# Altium PCB WSN_PCB.PcbDoc
Units mil, origin at the board's own origin, x right, y up, seen from the top; angles counter-clockwise.
Board outline 2375 x 2075 mil, 2 copper layers (Top Layer, Bottom Layer); 48 components, 44 nets, 216 pads, 65 vias.
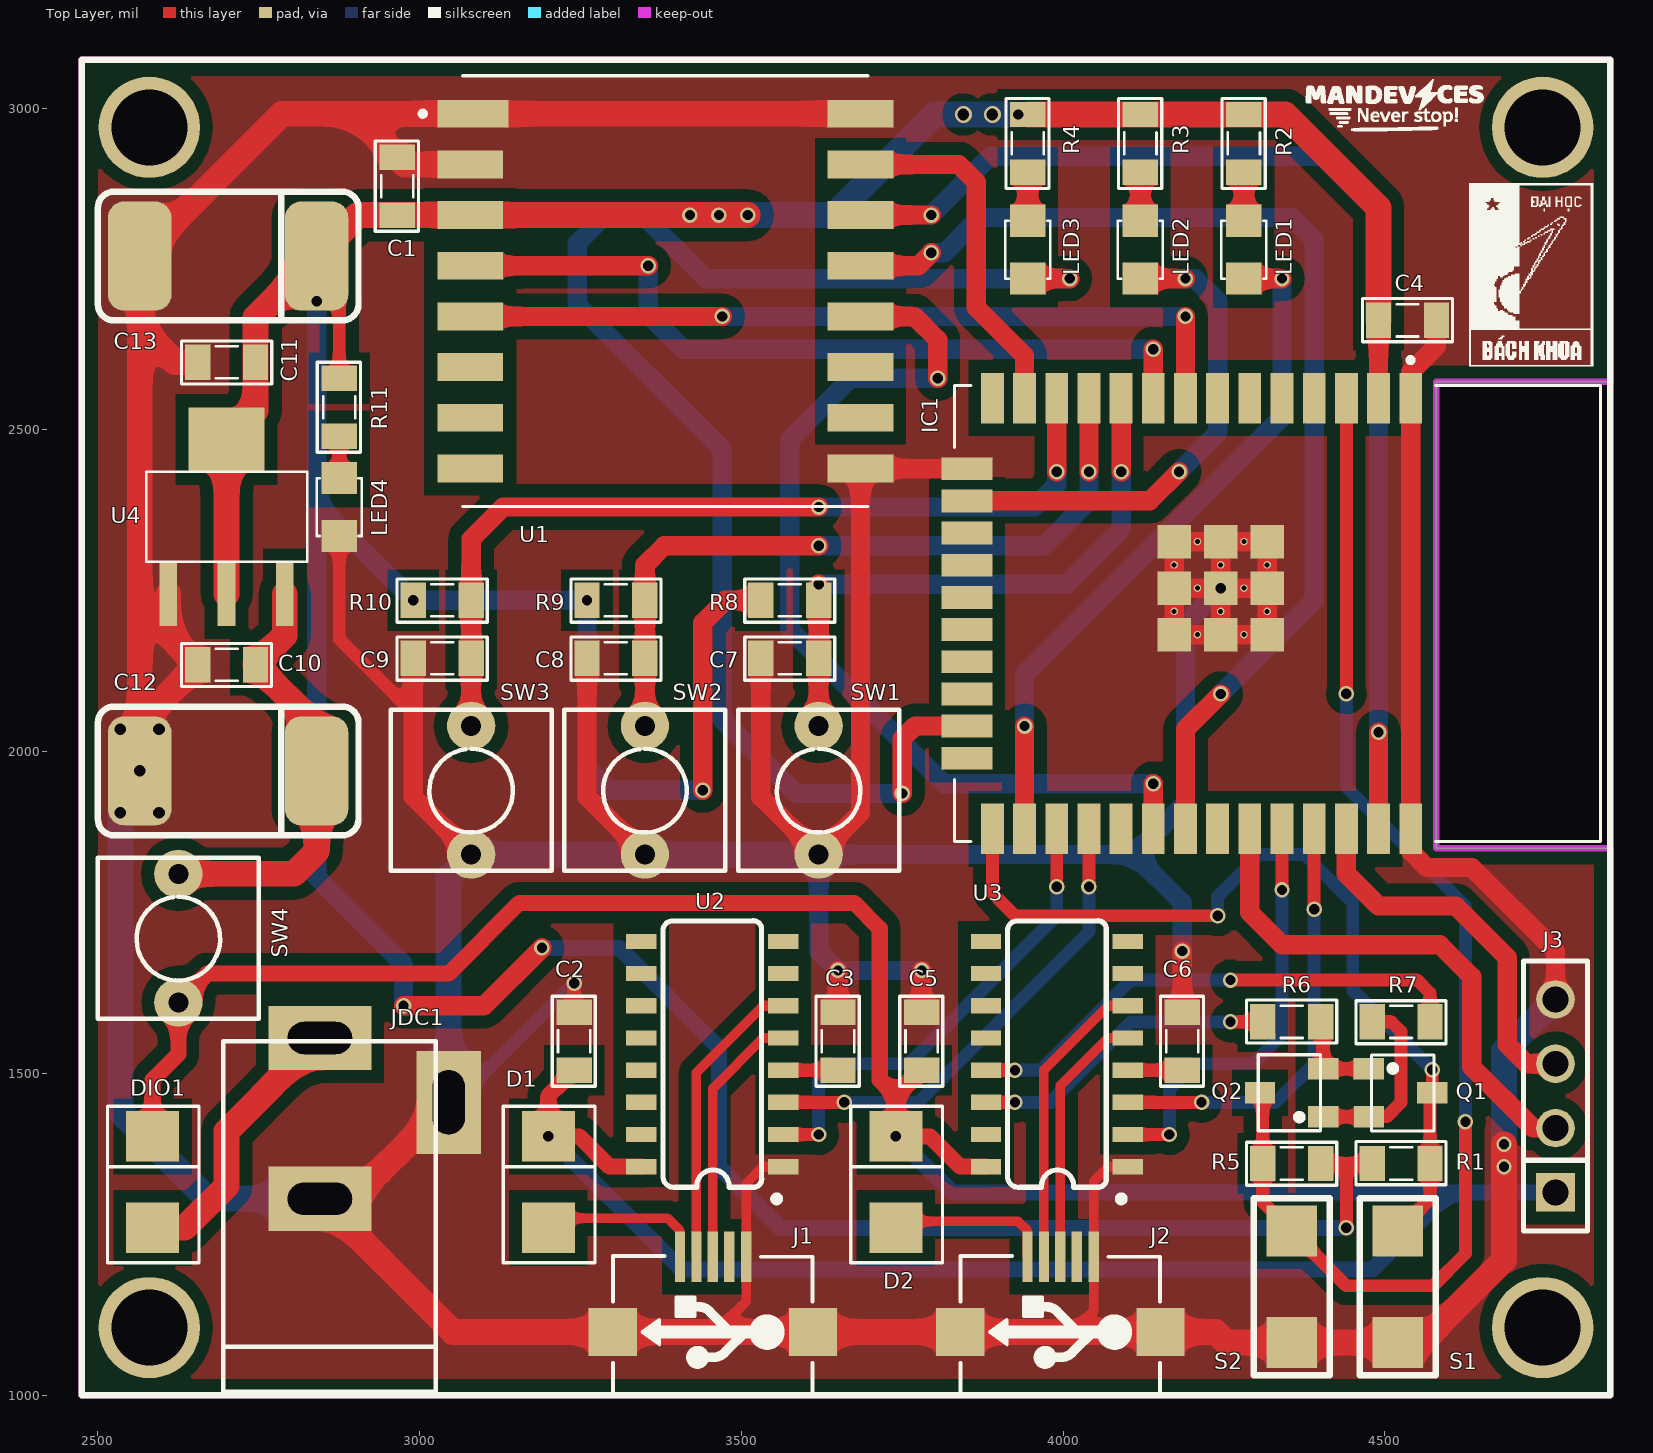
[diagram p0: Top Layer view]
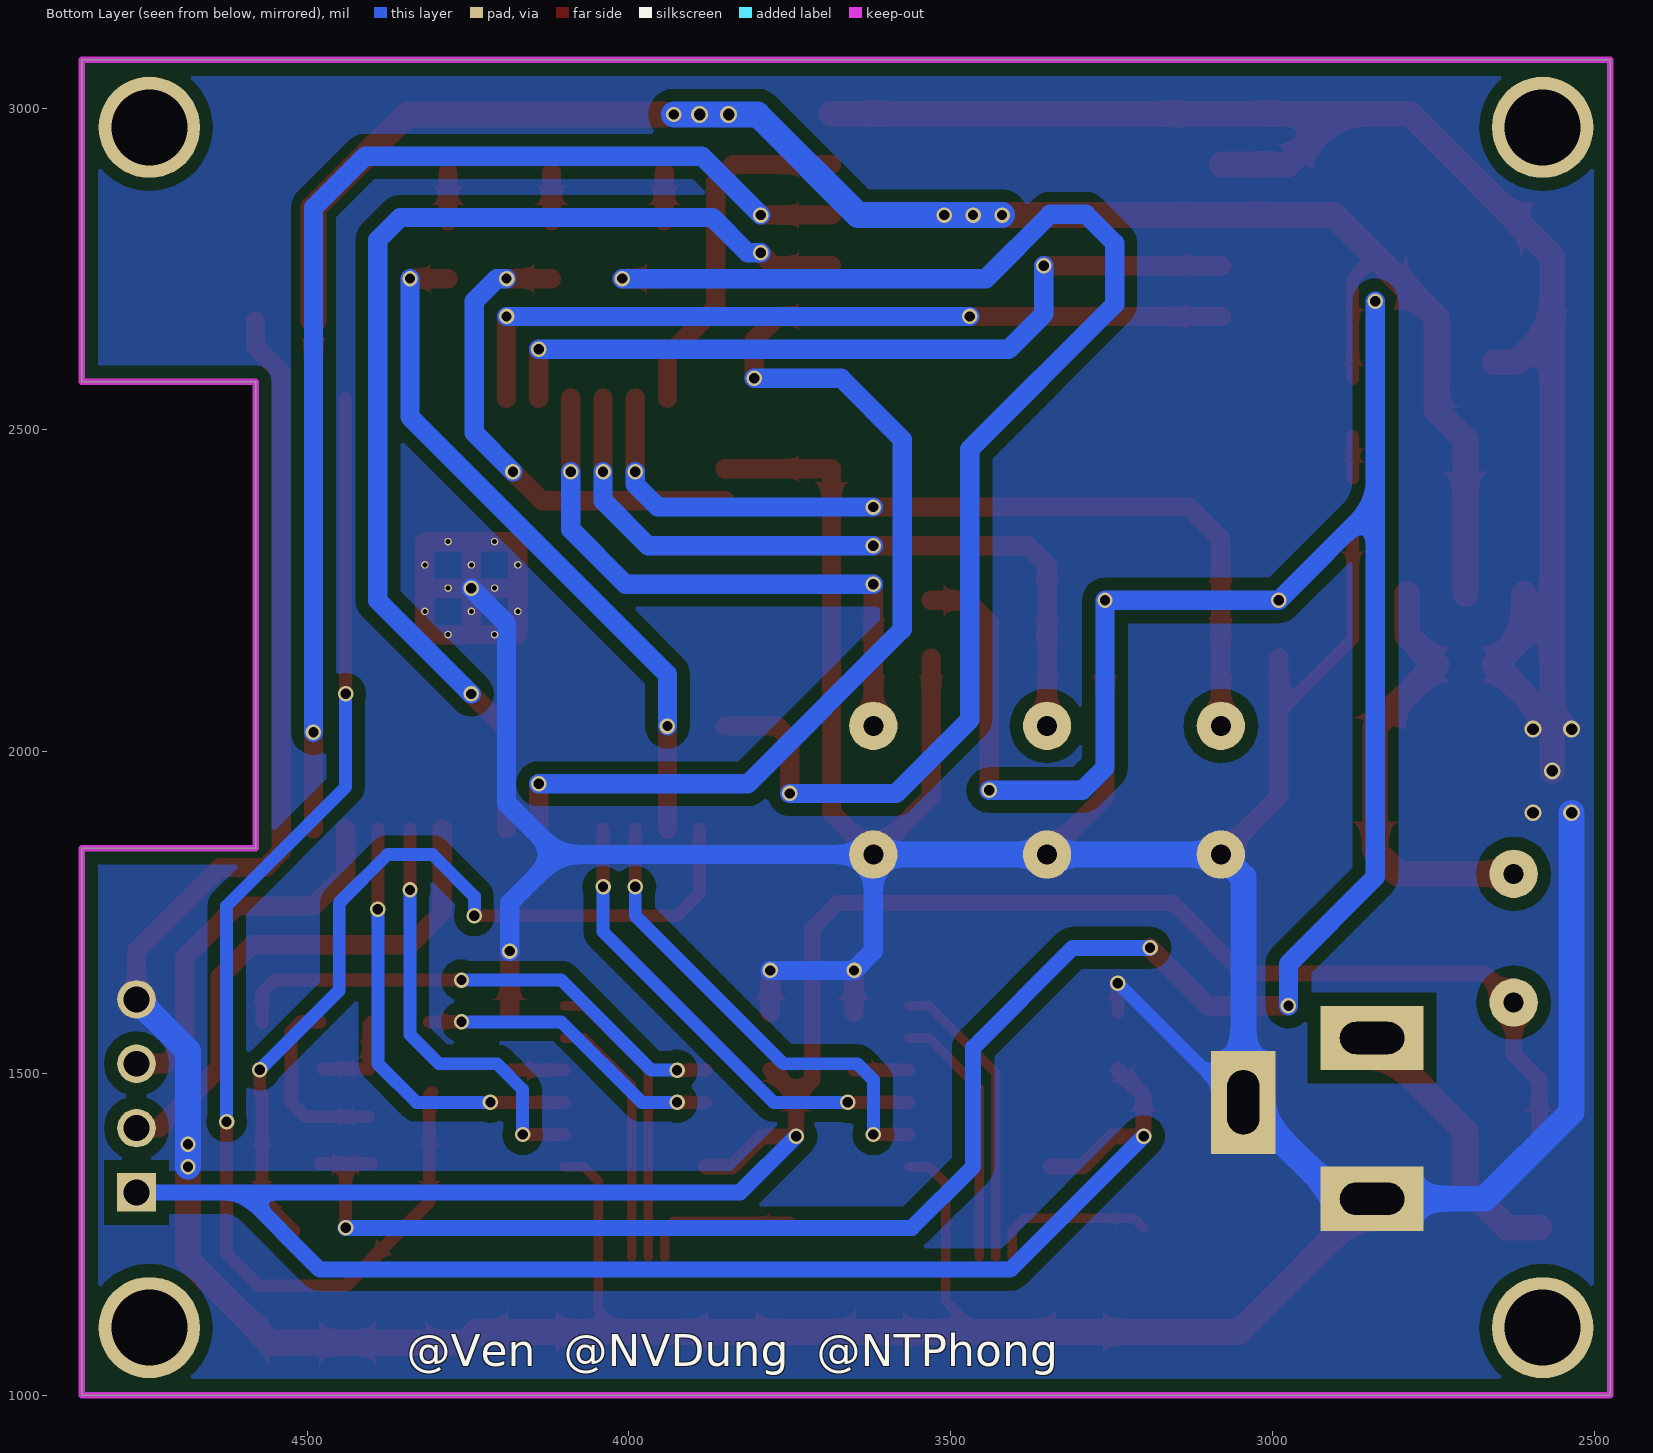
[diagram p1: Bottom Layer view, seen from below]
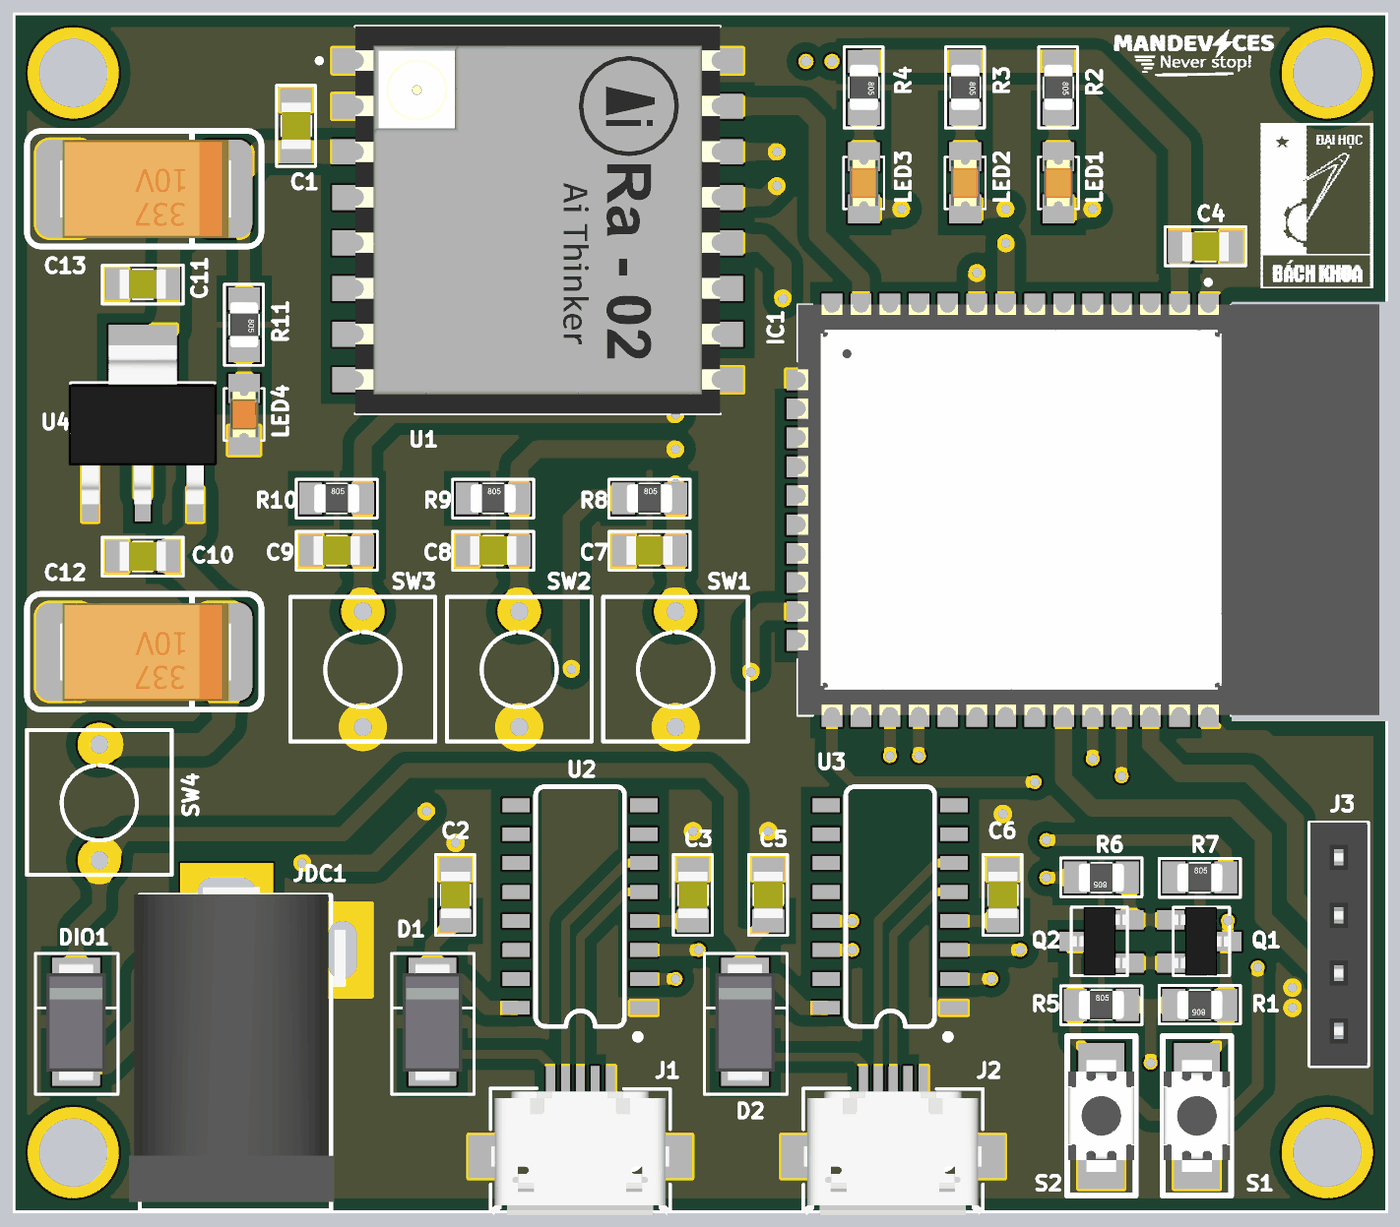
[diagram p2: 3D render of the assembled board from above, using the file's embedded part models]

## Layer stack, top to bottom
Top Solder: solder mask 0.4, Solder Resist, Dk 3.5
Top Layer: signal copper 1.4
Dielectric 1: dielectric 12.6, FR-4, Dk 4.8
Bottom Layer: signal copper 1.4
Bottom Solder: solder mask 0.4, Solder Resist, Dk 3.5

## Board outline
2475,1000 2475,3075 4850,3075 4850,2575 4580,2575 4580,1850 4850,1850 4850,1000

## Design rules (kind name [scope] priority, off if disabled: settings)
Clearance [All] p1: gap=20 ignorepadtopadclearanceinfootprint=TRUE except(0: Arc-Text Arc-Hole Track-Text Track-Hole SMDPad-Text SMDPad-Hole THPad-Text THPad-Hole Via-Text Via-Hole Fill-Text Fill-Hole Poly-Text Poly-Hole Region-Text Region-Hole Text-Text Text-Hole; 7: Arc-Arc Arc-Track Arc-SMDPad Track-Track Track-SMDPad SMDPad-SMDPad; 10: Arc-THPad Arc-Via Track-THPad Track-Via SMDPad-THPad SMDPad-Via THPad-THPad THPad-Via Via-Via)
DiffPairsRouting [All] p1: maxlimit=10 minlimit=10 mostfreqgap=10 toplayer_minwidth=15 toplayer_maxwidth=15 toplayer_prefwidth=15 bottomlayer_minwidth=15 bottomlayer_maxwidth=15 bottomlayer_prefwidth=15 maxuncoupledlength=500
PolygonConnect [All] p1: connectstyle=Direct reliefconductorwidth=10 reliefentries=4 polygonreliefangle="90 Angle" airgapwidth=10
RoutingVias [All] p1: holewidth=16 width=24 viastyle="Through Hole" minholewidth=16 minwidth=24 maxholewidth=20 maxwidth=28
SolderMaskExpansion [All] p1: expansion=4
Width [All] p1: maxlimit=40 minlimit=10 preferedwidth=20
29 further rules are at their usual default settings.

## Classes and differential pairs
component class U_POWER: C10 C11 C12 C13 DIO1 JDC1 LED4 R11 SW4 U4
component class U_MCU: C4 C5 C6 C7 C8 C9 D2 IC1 J2 J3 LED1 LED2 LED3 Q1 Q2 R1 R2 R3 R4 R5 R6 R7 R8 R9 R10 S1 S2 SW1 SW2 SW3 U3
component class U_COMM: C1 C2 C3 D1 J1 U1 U2
differential pair D1: +D1_P -D1_N
differential pair D0: +D0_P -D0_N

## Components (designator, comment, footprint, x,y, rotation, side; value= is the part's Value field where it differs from the comment)
C1 "10uF" CAP_0805 2965,2878.7 r270 top value=33p
C2 "10uF" CAP_0805 3240,1550 r270 top value=33p
C3 "100nF" CAP_0805 3650,1550 r270 top value=33p
C4 "10uF" CAP_0805 4535,2670 r180 top value=33p
C5 "10uF" CAP_0805 3780,1550 r270 top value=33p
C6 "100nF" CAP_0805 4185,1550 r270 top value=33p
C7 "10uF" CAP_0805 3575,2145 r0 top value=33p
C8 "10uF" CAP_0805 3305,2145 r0 top value=33p
C9 "10uF" CAP_0805 3035,2145 r0 top value=33p
C10 "220nF" CAP_0805 2700,2135 r0 top value=33p
C11 "100nF" CAP_0805 2700,2605 r0 top value=33p
C12 "220uF/10V" CAP_7343 2705,1970 r180 top
C13 "220uF/10V" CAP_7343 2705,2770 r180 top
D1 "Diode SMD" DIO-214AC(SMA) 3203,1309 r270 top value=1N5007
D2 "Diode SMD" DIO-214AC(SMA) 3743,1309 r270 top value=1N5007
DIO1 "Diode SMD" DIO-214AC(SMA) 2588,1309 r270 top value=1N5007
IC1 "ESP32-WROOM-32" MODULE_ESP32-WROOM-32 4332.91,2214.65 r270 top
J1 "USB-5" USB-M1 3455.51,1215 r180 top
J2 "USB-5" USB-M1 3995.51,1215 r180 top
J3 "JP4" JP4-C1T 4765,1315 r90 top
JDC1 "Jac DC" DC-IN 2945,1430 r90 top
LED1 "LED" LED-0805-Orange 4280.85,2825 r270 top value="LED 3 ly Single Colour"
LED2 "LED" LED-0805-Orange 4120,2825 r270 top value="LED 3 ly Single Colour"
LED3 "LED" LED-0805-Orange 3945,2825 r270 top value="LED 3 ly Single Colour"
LED4 "LED" LED-0805-Red 2875,2425 r270 top value="LED 3 ly Single Colour"
Q1 "2SC1815" SOT23D 4524.21,1469.6 r270 top value=C1815
Q2 "2SC1815" SOT23D 4355,1470 r90 top value=C1815
R1 "10k" RES-SMD-0805 4525,1360 r180 top
R2 "10k" RES-SMD-0805 4280.85,2945 r270 top
R3 "10k" RES-SMD-0805 4120,2945 r270 top
R4 "10k" RES-SMD-0805 3945,2945 r270 top
R5 "10k" RES-SMD-0805 4355,1360 r0 top
R6 "10k" RES-SMD-0805 4355,1580 r180 top
R7 "10k" RES-SMD-0805 4525,1580 r0 top
R8 "10k" RES-SMD-0805 3575,2235 r0 top
R9 "10k" RES-SMD-0805 3305,2235 r0 top
R10 "10k" RES-SMD-0805 3035,2235 r0 top
R11 "1k" RES-SMD-0805 2875,2535 r270 top
S1 "SW-SMD" "SW 3x2x4" 4520,1168.39 r270 top
S2 "SW-SMD" "SW 3x2x4" 4355,1168.39 r270 top
SW1 "SW" SW2 3620,1840 r90 top value="SW chip 2 pin"
SW2 "SW" SW2 3350,1840 r90 top value="SW chip 2 pin"
SW3 "SW" SW2 3080,1840 r90 top value="SW chip 2 pin"
SW4 "SW" SW2 2625,1610 r90 top value="SW chip 2 pin"
U1 "Ra-02 LoRa" Ra-02 3381.85,2715.59 r0 top
U2 "CH340C" SOP-16 3454.76,1530 r90 top
U3 "CH340C" SOP-16 3990.24,1530 r90 top
U4 "LM1117-ADJ" LM1117-SOP 2700,2295 r0 top

## Footprints (in the part's own frame and the unit in brackets; to place one, negate y for a bottom-side part, rotate by r counter-clockwise, add the part's x,y. Pads: shape width x height; smd on the part's side, far side on the other; paste and mask are expansions set on the pad)
CAP_0805 [mil]
  rect 39.37x55 smd: 1(-45,0) 2(45,0)
  silkscreen extent -70,-34 70,33, body extent -40,-25 40,25, height 24
CAP_7343 [mm] "Capacitor Tantalum 7343"
  rrect50% 2.5x4.3 smd: 1(-3.429,0) 2(3.556,0)
  silkscreen extent -5.08,-2.54 5.21,2.54, body extent -3.75,-2.14 3.75,2.16, height 2.8
DC-IN [mil] "Jac DC input"
  rect 100x160 hole 50 slot 100 at 90 deg: 1(125,100) 2(-125,100)
  rect 160x100 hole 50 slot 100 at 0 deg: 3(25,-100)
  silkscreen extent -425,-80 120,250, body extent -410,-105 134,269, height 434
DIO-214AC(SMA) [mm] "DO-214AC Diode Smallest Size"
  rect 2x2.1 smd: 1(1.245,-0.076) 2(-2.367,-0.076)
  silkscreen extent -3.56,-1.86 2.62,1.76, body extent -3.13,-1.38 2.07,1.22, height 2.4
JP4-C1T [mm] "4 row, straight, gold plating"
  rect 1.52x1.52 hole 1.02: 1(0,0)
  round 1.52 hole 1.02: 2(2.54,0) 3(5.08,0) 4(7.62,0)
  silkscreen extent -1.52,-1.27 9.14,1.27, body extent -1.52,-1.25 9.14,1.25, height 8.51
LED-0805-Orange [mil]
  rect 50x55 smd: 1(0,0) 2(90,0)
  silkscreen extent 0,-35 90,35, body extent 5,-25 85,25, height 43
LED-0805-Red [mil]
  rect 50x55 smd: 1(0,0) 2(90,0)
  silkscreen extent 0,-35 90,35, body extent 5,-25 85,25, height 43
LM1117-SOP [mm]
  rect 0.7x2.54 smd: 1(-2.3,-1.27) 2(0,-1.27) 3(2.3,-1.27)
  rect 3x2.54 smd: 2(0,4.826)
  silkscreen extent -3.17,0 3.17,3.56, body extent -3.25,-1.78 3.25,5.18, height 1.68
MODULE_ESP32-WROOM-32 [mm]
  rect 2x0.9 smd: 1(-8.5,5.26) 2(-8.5,3.99) 3(-8.5,2.72) 4(-8.5,1.45) 5(-8.5,0.18) 6(-8.5,-1.09) 7(-8.5,-2.36) 8(-8.5,-3.63) 9(-8.5,-4.9) 10(-8.5,-6.17) 11(-8.5,-7.44) 12(-8.5,-8.71) 13(-8.5,-9.98) 14(-8.5,-11.25) 25(8.5,-11.25) 26(8.5,-9.98) 27(8.5,-8.71) 28(8.5,-7.44) 29(8.5,-6.17) 30(8.5,-4.9) 31(8.5,-3.63) 32(8.5,-2.36) 33(8.5,-1.09) 34(8.5,0.18) 35(8.5,1.45) 36(8.5,2.72) 37(8.5,3.99) 38(8.5,5.26)
  rect 0.9x2 smd: 15(-5.715,-12.25) 16(-4.445,-12.25) 17(-3.175,-12.25) 18(-1.905,-12.25) 19(-0.635,-12.25) 20(0.635,-12.25) 21(1.905,-12.25) 22(3.175,-12.25) 23(4.445,-12.25) 24(5.715,-12.25)
  rect 1.33x1.33 smd: 39_1(-2.835,-0.405) 39_2(-1,-0.405) 39_3(0.835,-0.405) 39_4(-2.835,-2.24) 39_5(-1,-2.24) 39_6(0.835,-2.24) 39_7(-2.835,-4.075) 39_8(-1,-4.075) 39_9(0.835,-4.075)
  round 0.3 hole 0.2: 39_10(-1.917,-0.405) 39_11(-0.082,-0.405) 39_12(-2.835,-1.322) 39_13(-1,-1.322) 39_14(0.835,-1.322) 39_15(-1.917,-2.24) 39_16(-0.082,-2.24) 39_17(-2.835,-3.157) 39_18(-1,-3.157) 39_19(0.835,-3.157) 39_20(-1.917,-4.075) 39_21(-0.082,-4.075)
  silkscreen extent -10.1,-12.75 9,12.75, body extent -10.54,-12.75 8.98,12.75, height 3.2
Ra-02 [mm]
  rect 2.8x1.1 smd: 1(-7.6,7)
  rect 2.6x1.1 smd: 2(-7.7,5) 3(-7.7,3) 4(-7.7,1) 5(-7.7,-1) 6(-7.7,-3) 7(-7.7,-5) 8(-7.7,-7) 9(7.7,-7) 10(7.7,-5) 11(7.7,-3) 12(7.7,-1) 13(7.7,1) 14(7.7,3) 15(7.7,5) 16(7.7,7)
  silkscreen extent -9.68,-8.5 8,8.5, body extent -8,-8.49 8,8.51, height 3.03
RES-SMD-0805 [mil]
  rect 39.37x55 smd: 1(-45,0) 2(45,0)
  silkscreen extent -70,-34 70,33, body extent -39,-25 39,25, height 31
SOP-16 [mm]
  rect 0.6x1.2 smd: 1(-4.445,-2.8) 2(-3.175,-2.8) 3(-1.905,-2.8) 4(-0.635,-2.8) 5(0.635,-2.8) 6(1.905,-2.8) 7(3.175,-2.8) 8(4.445,-2.8) 9(4.445,2.8) 10(3.175,2.8) 11(1.905,2.8) 12(0.635,2.8) 13(-0.635,2.8) 14(-1.905,2.8) 15(-3.175,2.8) 16(-4.445,2.8)
  silkscreen extent -5.84,-2.67 5.26,1.95, body extent -4.95,-3.47 4.95,3.47, height 1.75
SOT23D [mm] "SOT 23C - 1-3-2 - BCE"
  rect 0.85x1.2 smd: 1(-0.95,-1.25) 2(0.94,-1.245) 3(0,1.25)
  silkscreen extent -1.5,-1.14 1.5,1.32, body extent -1.5,-1.17 1.5,1.33, height 1.06
SW2 [mil] "SW button 2pin, 250x 250 mil"
  round 75 hole 31: 1(0,0) 2(200,0)
  silkscreen extent -25,-125 225,125
"SW 3x2x4" [mm]
  rect 2x2 smd: 1(-2.2,0) 2(2.2,0)
  silkscreen extent -3.5,-1.5 3.5,1.5, body extent -2.45,-1.45 2.45,1.45, height 2
USB-M1 [mm]
  rect 0.4x2 smd: 1(1.3,0) 2(0.65,0) 3(0,0) 4(-0.65,0) 5(-1.321,0)
  rect 1.9x1.9 smd: 5(-3.95,2.968) 5(3.95,2.968)
  silkscreen extent -3.94,-0.03 3.94,5.46, body extent -3.98,0.11 4,5.54, height 2.71

## Part data
C1 C2 C3 C4 C5 C6 C7 C8 C9 C10 C11: library part CapSMD, "Capacitor", LatestRevisionDate=17-Jul-2002, LatestRevisionNote="Re-released for DXP Platform.", PackageReference=RAD-0.3, Published=8-Jun-2000, Publisher="Altium Limited"
C12 C13: library part CAP_TAN_SMD, "Polazied Tantalum Capacitor"
D1 D2 DIO1: "Default Diode", Code - JEDEC=DO-214-AB, Published=8-Jun-2000, Publisher="Altium Limited", Revision="July-2002: Re-released for DXP Platform."
IC1: "Bluetooth, WiFi Transceiver Module 2.4GHz ~ 2.5GHz Surface Mount", Package="Module Espressif Systems", Digi-Key_Part_Number=1904-1010-1-ND, Digi-Key_Purchase_URL=https://www.digikey.com/product-detail/en/espressif-systems/ESP32-WROOM-32/1904-1010-1-ND/8544305?utm_source=snapeda&utm_medium=aggregator&utm_campaign=symbol, MF="Espressif Systems", MP=ESP32-WROOM-32, SnapEDA_Link=https://www.snapeda.com/parts/ESP32-WROOM-32/Espressif%20Systems/view-part/2753322/?ref=snap
J1 J2: Manufacturer=FCI, Manufacturer Part Number=10118193-0001LF, Supplier Part Number 1=609-4616-1-ND, .Checked PCB=RF, .Checked SCH=MM, .Creator=MM, Category="Connectors, Interconnects", ComponentLink1Description=http://portal.fciconnect.com/Comergent//fci/drawing/10118193.pdf, ComponentLink1URL=http://portal.fciconnect.com/Comergent//fci/drawing/10118193.pdf, Connector Type="USB - micro B", Features="Shielded, Solder Retention", Gender=Receptacle, Ingress Protection=-, Mounting Type="Surface Mount, Right Angle, Horizontal", Number of Contacts=5, Packaging="Cut Tape (CT)", Pricing 1="1=0.46, 10=0.433, 25=0.3712, 50=0.3156, 100=0.3032, 250=0.27224, 500=0.25988 (USD)", RoHS="RoHS Compliant", Specifications="USB 2.0", Stock 1=28642, Supplier 1=Digi-Key
J3: "WR-PHD 2.54 mm Angled Socket Header", Manufacturer="Würth Elektronik eiSos GmbH", partNo=613004143121, ComponentLink1 Description=Manufacturer, ComponentLink1URL=http://www.we-online.com, ComponentLink2 Description=Datasheet, ComponentLink2URL=http://katalog.we-online.de/em/datasheet/6130xx143121.pdf, Created by="Karrer Zheng", Created Date="29 March 2013", NoPins=04
JDC1: library part DCIN, "Jac DC input"
LED1 LED2 LED3 LED4: "LED Single colour Green and Red"
Q1 Q2: library part C1815, "NPN 600mW, ECB", =C2383
R1 R2 R3 R4 R5 R6 R7 R8 R9 R10 R11: library part "Resistor - SMD", "Resistor SMD", Manufacturer="Generic Components", Class=Passive, Published=08/06/2000, Publisher="Altium Hobart Technology Centre"
S1 S2: "Switch", LatestRevisionDate=17-Jul-2002, LatestRevisionNote="Re-released for DXP Platform.", PackageReference=SPST-2, Published=24-Mar-1999, Publisher="Altium Limited"
SW1 SW2 SW3 SW4: library part SW2, "Switch button 2 pin"
U1: "LoRa Module Ra-02"
U2 U3: "USB to serial chip CH340", Package=Package, Availability=Unavailable, Check_prices=https://www.snapeda.com/parts/CH340C/WCH/view-part/5428851/?ref=eda, MF=WCH, MP=CH340C, Price=None, SnapEDA_Link=https://www.snapeda.com/parts/CH340C/WCH/view-part/5428851/?ref=snap
U4: "800mA Low-Dropout Linear Regulator", Creator="Nguyen Ba Bien", Website=http://group3i.net

## Free pads (board coordinates)
  round 157.48 hole 118.11: 0(2580,1105) 0(2580,2970) 0(4745,1105) 0(4745,2970)

## Via types
v1: diameter 24, hole 16, Top Layer to Bottom Layer, 58 vias
v2: diameter 26, hole 18, Top Layer to Bottom Layer, 7 vias

## Nets (pads, with @x,y where several pads share a name; then routed paths per layer and width w, separated by ;. In a path a pad name is that pad's centre, name@x,y a point inside that pad or via, vN(x,y) a via of type N, cw(c..) or ccw(c..) an arc to the next point about the centre after c; other vN are vias at no path point)
3V3: C1.2 C4.2 C11.2 C13.1 IC1.2 R1.2 R2.1 R3.1 R4.1 R5.2 R8.1 R9.1 R10.1 R11.1 U1.3 U4.2 | length 7382.3
  Top Layer w20: C13.1 2875,2735 R11.1 ; R5.2 4440,1360 ; v1(4440,1260) 4440,1360 ; R1.2 4440,1360
  Top Layer w30: v1(2975,1605) 3100,1605 v1(3190,1695) ; v1(3440,1940) 3440,2200 3475,2235 R8.1 ; IC1.2 C4.2
  Top Layer w40: U4.2@2700,2245 2700,2485 2745,2530 C11.2 2745,2675 C13.1 2903.7,2833.7 C1.2 U1.3 v1(3420,2833.7) v1(3465,2833.7) v1(3510,2833.7) ; R4.1 R3.1 R2.1 4345,2990 4490,2845 C4.2
  Bottom Layer w25: v1(3190,1695) 3310,1695 3465,1540 3465,1355 3560,1260 v1(4440,1260)
  Bottom Layer w30: v1(2840,2700) 2840,2385 ; v1(2975,1605) 2975,1670 2840,1805 2840,2385 ; v1(3440,1940) 3295,1940 3260,1975 v1(3260,2235) v1(2990,2235) 2840,2385
  Bottom Layer w40: v1(3420,2833.7) v1(3465,2833.7) v1(3510,2833.7) 3643.7,2833.7 3800,2990 v2(3845,2990) v2(3890,2990) v1(3930,2990)
5V: C2.2 C5.2 D1.2 D2.2 DIO1.2 J3.1 SW4.1 U2.16 U3.16 | length 4824.5
  Top Layer w25: DIO1.2 2585,1490 2625,1530 SW4.1 2670,1655 3045,1655 3155,1765 3675,1765 3715,1725 3715,1490 3740,1465 ; C2.2 3200,1465 v1(3200,1402.2) 3247.8,1402.2 3295,1355 U2.16 ; C5.2 3740,1465 ; U3.16 3840,1355 3792.79,1402.2 v1(3740,1402.2) 3740,1465
  Bottom Layer w25: v1(3200,1402.2) 3407.2,1195 4480,1195 4600,1315 ; v1(3740,1402.2) 3827.2,1315 4600,1315 ; J3.1 4600,1315
D0_N: J2.2 U3.6 | length 462.3
  Top Layer w15: J2.2 3969.92,1505.57 4069.35,1605 U3.6
D0_P: J2.3 U3.5 | length 401.7
  Top Layer w15: J2.3 3995.51,1481.16 4069.35,1555 U3.5
D1_N: J1.2 U2.6 | length 464.2
  Top Layer w15: J1.2 3429.92,1501.04 3533.88,1605 U2.6
D1_P: J1.3 U2.5 | length 403.6
  Top Layer w15: J1.3 3455.51,1476.63 3533.88,1555 U2.5
GND: C1.1 C2.1 C3.1 C4.1 C5.1 C6.1 C7.1 C8.1 C9.1 C10.1 C11.1 C12.2 C13.2 IC1.1 IC1.15 IC1.38 IC1.39_1 IC1.39_2 IC1.39_3 IC1.39_4 IC1.39_5 IC1.39_6 IC1.39_7 IC1.39_8 IC1.39_9 IC1.39_10 IC1.39_11 IC1.39_12 IC1.39_13 IC1.39_14 IC1.39_15 IC1.39_16 IC1.39_17 IC1.39_18 IC1.39_19 IC1.39_20 IC1.39_21 J1.5 J2.5 J3.4 JDC1.2 JDC1.3 LED4.2 S1.2 S2.2 SW1.1 SW2.1 SW3.1 U1.1 U1.2 U1.9 U1.16 U2.1 U3.1 U4.1 | length 14259.2
  Top Layer w15: 3460,1098.16 3507.51,1145.67 3507.51,1215 3507.51,1328.63 3533.88,1355 U2.1 ; 4015,1098.16 4047.51,1130.67 4047.51,1215 4047.51,1332.51 4070,1355 U3.1
  Top Layer w20: LED4.2 2875,2175 2990,2060 ; C2.1 v1(3240,1640)
  Top Layer w30: C9.1 2990,2060 2990,1930 SW3.1 ; C8.1 3260,1930 SW2.1 ; C7.1 3530,1930 SW1.1 3685,1905 U1.9 3685.35,2439.65 IC1.15 ; C3.1 v1(3650,1660) ; C5.1 v1(3780,1660) ; C6.1 v1(4185,1690) ; C4.1 4580,2630 4540,2590 IC1.1 IC1.38 4540,1845 4565,1820 4635,1820 4765,1690 J3.4 ; IC1.39_8 IC1.39_18 IC1.39_5 ; IC1.39_8 IC1.39_20 IC1.39_7 IC1.39_17 IC1.39_4 ; IC1.39_8 IC1.39_21 IC1.39_9 IC1.39_19 IC1.39_6 ; IC1.39_6 IC1.39_16 IC1.39_5 ; IC1.39_6 IC1.39_14 IC1.39_3 IC1.39_11 IC1.39_2 ; IC1.39_5 IC1.39_15 IC1.39_4 ; IC1.39_5 v1(4245,2254.02) IC1.39_13 IC1.39_2 ; IC1.39_4 IC1.39_12 IC1.39_1 IC1.39_10 IC1.39_2
  Top Layer w40: v2(2565,1970) C12.2@2565,2045 ; U4.1 2609.45,2180.55 ; C11.1 2620,2605 2565,2660 ; JDC1.3 2895,1305 JDC1.2 3051.84,1098.16 3300,1098.16 3460,1098.16 3611.02,1098.16 3840,1098.16 4015,1098.16 4151.02,1098.16 4236.84,1098.16 4253.23,1081.77 S2.2 S1.2 4556.77,1081.77 4685,1210 v1(4685,1355) v1(4685,1390) ; U1.2 2976.26,2912.44 C1.1 2897.52,2991.18 ; U1.16 U1.1 2897.52,2991.18 ; C12.2@2565,2045 C10.1 2609.45,2180.55 ; C12.2@2565,2045 2565,2225 ; 2565,2225 2609.45,2180.55 ; 2565,2225 2565,2660 ; 2565,2660 C13.2 2786.18,2991.18 2897.52,2991.18
  Bottom Layer w20: JDC1.3 3055,1455 v1(3240,1640)
  Bottom Layer w30: v1(3780,1660) v1(3650,1660) 3620,1690 SW1.1 4110,1840 ; v1(4185,1690) 4185,1765 4110,1840 ; v1(4245,2254.02) 4190,2199.02 4190,1920 4110,1840
  Bottom Layer w40: v2(2535,1905) 2535,1440 2670,1305 JDC1.2 2895,1305 JDC1.3 3045,1805 SW3.1 SW2.1 SW1.1 ; v1(4685,1355) v1(4685,1390) 4685,1535 J3.4
  other v2: 2595,1905 2535,2035 2595,2035
GPIO0: IC1.25 Q1.3 R1.1 S1.1 | length 1345.7
  Top Layer w20: IC1.25 3890,1780 3925,1745 v1(4240,1745) ; S1.1 4570,1305 R1.1 4570,1466.17 Q1.3 v1(4573.43,1505.57)
  Bottom Layer w20: v1(4240,1745) 4240,1775 4305,1840 4375,1840 4450,1765 4450,1629 v1(4573.43,1505.57)
GPIO2: IC1.24
GPIO4: IC1.26 LED1.2 | length 1079.8
  Top Layer w30: IC1.26 v1(3940,2039.65) ; LED1.2 v1(4340,2735)
  Bottom Layer w30: v1(3940,2039.65) 3940,2120 4340,2520 v1(4340,2735)
GPIO5: IC1.29
GPIO12: IC1.14
GPIO13: IC1.16 LED2.2 | length 772.5
  Top Layer w30: IC1.16 4134.65,2389.65 v1(4180,2435) ; LED2.2 v1(4190,2735)
  Bottom Layer w30: v1(4180,2435) 4240,2495 4240,2700 4205,2735 v1(4190,2735)
GPIO14: IC1.13 U1.15 | length 558.1
  Top Layer w30: U1.15 3837.56,2912.44 3865,2885 3865,2690 3940,2615 IC1.13
GPIO15: IC1.23 LED3.2 | length 2244.7
  Top Layer w30: v1(3750,1935) 3750,2020 3769.65,2039.65 IC1.23 ; LED3.2 v1(4010,2735)
  Bottom Layer w30: v1(3750,1935) 3585,1935 3470,2050 3470,2470 3245,2695 3245,2790 3290,2835 3345,2835 3445,2735 v1(4010,2735)
GPIO16: IC1.27 U2.2 | length 750.6
  Top Layer w20: U2.2 v1(3620,1405) ; v1(3990,1790) IC1.27
  Bottom Layer w20: v1(3620,1405) 3620,1490 3645,1515 3760,1515 3990,1745 v1(3990,1790)
GPIO17: IC1.28 U2.3 | length 744.8
  Top Layer w20: U2.3 v1(3660,1455) ; v1(4040,1790) IC1.28
  Bottom Layer w20: v1(3660,1455) 3775,1455 4040,1720 v1(4040,1790)
GPIO18: IC1.30 U1.12 | length 1493.8
  Top Layer w30: U1.12 3768.78,2676.22 3805,2640 v1(3805,2580) ; IC1.30 v1(4140,1950)
  Bottom Layer w30: v1(3805,2580) 3670,2580 3575,2485 3575,2190 3815,1950 v1(4140,1950)
GPIO19: IC1.31 U1.13 | length 1748.4
  Top Layer w30: U1.13 3774.96,2754.96 v1(3795,2775) ; IC1.31 4190,2034.92 v1(4244.72,2089.65)
  Bottom Layer w30: v1(3795,2775) 3815.04,2775 3870.04,2830 4355,2830 4390,2795 4390,2234.92 v1(4244.72,2089.65)
GPIO21: IC1.33 J3.2 | length 825.8
  Top Layer w30: IC1.33 4290,1750 4340,1700 4585,1700 4635,1650 4635,1510 4730,1415 J3.2
GPIO22: IC1.36 J3.3 | length 596.3
  Top Layer w30: IC1.36 4440,1810 4490,1760 4610,1760 4690,1680 4690,1545 4720,1515 J3.3
GPIO23: IC1.37 U1.14 | length 1841
  Top Layer w30: U1.14 v1(3795,2833.7) ; IC1.37 v1(4490,2030)
  Bottom Layer w30: v1(3795,2833.7) 3886.3,2925 4410,2925 4490,2845 v1(4490,2030)
GPIO25: C7.2 IC1.10 R8.2 SW1.2 | length 929.5
  Top Layer w30: SW1.2 R8.2 v1(3620,2260) ; v1(4090,2435) IC1.10
  Bottom Layer w30: v1(3620,2260) 4005,2260 4090,2345 v1(4090,2435)
GPIO26: C8.2 IC1.11 R9.2 SW2.2 | length 1140.7
  Top Layer w30: SW2.2 C8.2 R9.2 3350,2290 3380,2320 v1(3620,2320) ; v1(4040,2435) IC1.11
  Bottom Layer w30: v1(3620,2320) 3970,2320 4040,2390 v1(4040,2435)
GPIO27: C9.2 IC1.12 R10.2 SW3.2 | length 1369.5
  Top Layer w30: SW3.2 C9.2 3080,2330 3130,2380 v1(3620,2380) ; v1(3990,2435) IC1.12
  Bottom Layer w30: v1(3620,2380) 3955,2380 3990,2415 v1(3990,2435)
GPIO32: IC1.8 U1.5 | length 1238.2
  Top Layer w30: U1.5 v1(3470,2676.22) ; IC1.8 v1(4190,2676.22)
  Bottom Layer w30: v1(3470,2676.22) v1(4190,2676.22)
GPIO33: IC1.9 U1.4 | length 1234.8
  Top Layer w30: U1.4 v1(3355,2754.96) ; IC1.9 v1(4140,2625)
  Bottom Layer w30: v1(3355,2754.96) 3355,2680 3410,2625 v1(4140,2625)
NetC3_2: C3.2 U2.4 | length 85
  Top Layer w20: U2.4 C3.2
NetC6_2: C6.2 U3.4 | length 84.5
  Top Layer w20: U3.4 C6.2
NetC10_2: C10.2 C12.1 SW4.2 U4.3 | length 687.7
  Top Layer w40: SW4.2 2805,1810 2840,1845 C12.1 2840,2040 C10.2 2790.55,2180.55 U4.3
NetD1_1: D1.1 J1.1 | length 259.2
  Top Layer w15: D1.1 3215,1275 3385,1275 3404.33,1255.67 J1.1
NetD2_1: D2.1 J2.1 | length 255.1
  Top Layer w15: D2.1 3750,1270 3930,1270 3944.33,1255.67 J2.1
NetDIO1_1: DIO1.1 JDC1.1 | length 432
  Top Layer w40: DIO1.1 2635,1260 2700,1325 2700,1410 JDC1.1
NetLED1_1: LED1.1 R2.2 | length 75
  Top Layer w30: LED1.1 R2.2
NetLED2_1: LED2.1 R3.2 | length 75
  Top Layer w30: LED2.1 R3.2
NetLED3_1: LED3.1 R4.2 | length 75
  Top Layer w30: LED3.1 R4.2
NetLED4_1: LED4.1 R11.2 | length 65
  Top Layer w20: LED4.1 R11.2
NetQ1_1: Q1.1 Q2.2 R6.1 | length 145.7
  Top Layer w20: R6.1 4404,1576 Q2.2 Q1.1
NetQ1_2: Q1.2 Q2.1 R7.1 | length 291.3
  Top Layer w20: Q2.1 Q1.2 4502.6,1432.6 4525,1455 4525,1565 4510,1580 R7.1
NetR6_2: R6.2 U3.14 | length 481.8
  Top Layer w20: U3.14 v1(3925,1455) ; v1(4260,1580) R6.2
  Bottom Layer w20: v1(3925,1455) 3980,1455 4105,1580 v1(4260,1580)
NetR7_2: R7.2 U3.13 | length 801.3
  Top Layer w20: U3.13 v1(3925,1505) ; v1(4260,1645) 4550,1645 4570,1625 R7.2
  Bottom Layer w20: v1(3925,1505) 3965,1505 4105,1645 v1(4260,1645)
nRST: IC1.3 Q2.3 R5.1 S2.1 | length 1967.2
  Top Layer w20: Q2.3 4310,1465.79 R5.1 4310,1300 S2.1 4440,1170 4575,1170 4625,1220 v1(4625,1425) ; v1(4440,2090) IC1.3
  Bottom Layer w20: v1(4440,2090) 4440,1945 4625,1760 v1(4625,1425)
RX0: IC1.34 U3.2 | length 664.7
  Top Layer w20: U3.2 v1(4165,1405) ; v1(4340,1785) IC1.34
  Bottom Layer w20: v1(4165,1405) 4165,1475 4205,1515 4295,1515 4340,1560 v1(4340,1785)
RXI: IC1.35 U3.3 | length 679.4
  Top Layer w20: U3.3 v1(4215,1455) ; v1(4390,1755) IC1.35
  Bottom Layer w20: v1(4215,1455) 4330,1455 4390,1515 v1(4390,1755)
pads on no net: IC1.4 IC1.5 IC1.6 IC1.7 IC1.17 IC1.18 IC1.19 IC1.20 IC1.21 IC1.22 IC1.32 J1.4 J2.4 U1.6 U1.7 U1.8 U1.10 U1.11 U2.7 U2.8 U2.9 U2.10 U2.11 U2.12 U2.13 U2.14 U2.15 U3.7 U3.8 U3.9 U3.10 U3.11 U3.12 U3.15

## Polygon pours and split planes (outlines as drawn)
GND on Top Layer "GND_L01_P000" (solid, remove dead copper, pour order 0): 2475,1000 4850,1000 4850,3075 2475,3075
GND on Bottom Layer "GND_L02_P002" (solid, remove dead copper, pour order 2): 2480,1000 4850,1000 4850,3075 2475,3075

## Keep-outs
Keep-Out Layer:
  lines w10: 2475,1000 2545,1000 4850,1000 4850,1850 4580,1850 4580,2575 4850,2575 4850,3075 4220,3075 2575,3075 2475,3075 2475,1000

## Silkscreen, mask and mechanical layers (free items; w line width, h text height)
Top Overlay:
  drawing of 1608 lines, arcs and shapes, not listed
Bottom Overlay:
  text "@Ven  @NVDung  @NTPhong" at 4345,1045 h50

## Text inside footprints (layer, text, board x,y; h text height)
IC1: Mechanical 13 "ANTENNA" at 4687.24,2450.87 h25 r270